# EAGLE board Temp Schematic (EAGLE 9.6.2)
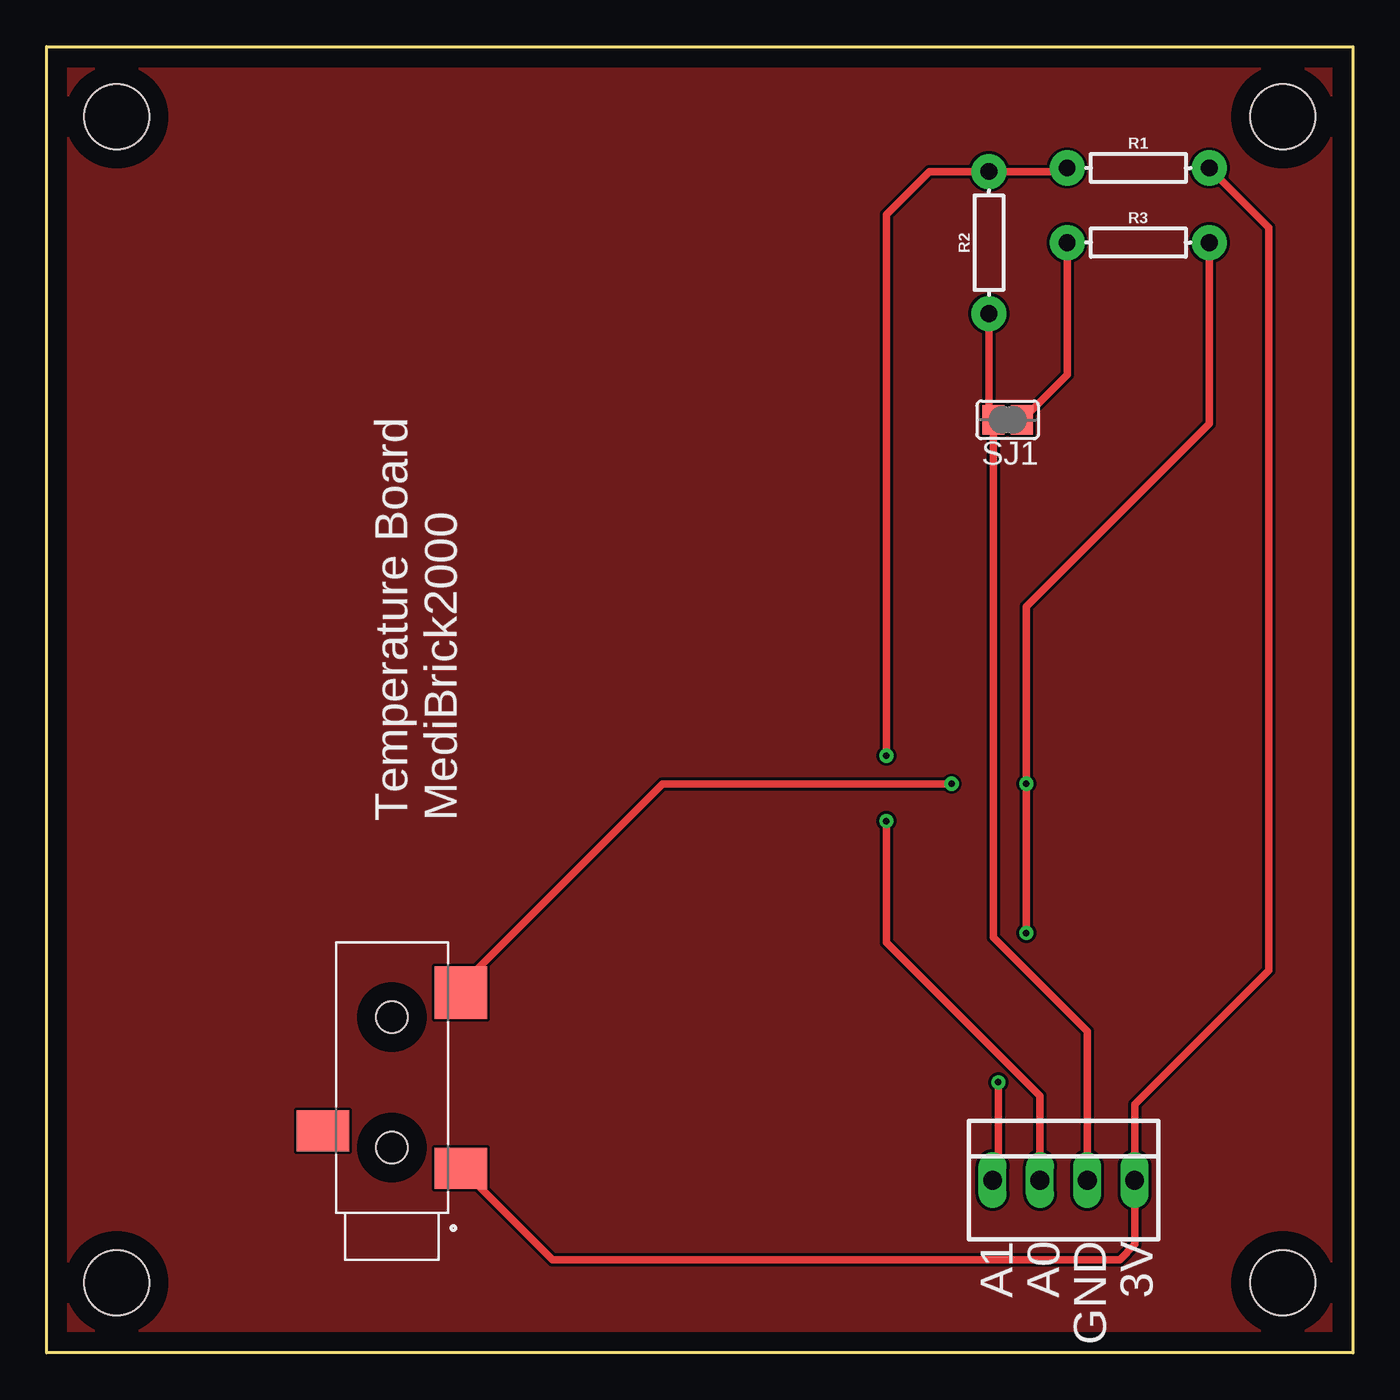
[diagram p0: board, top side]
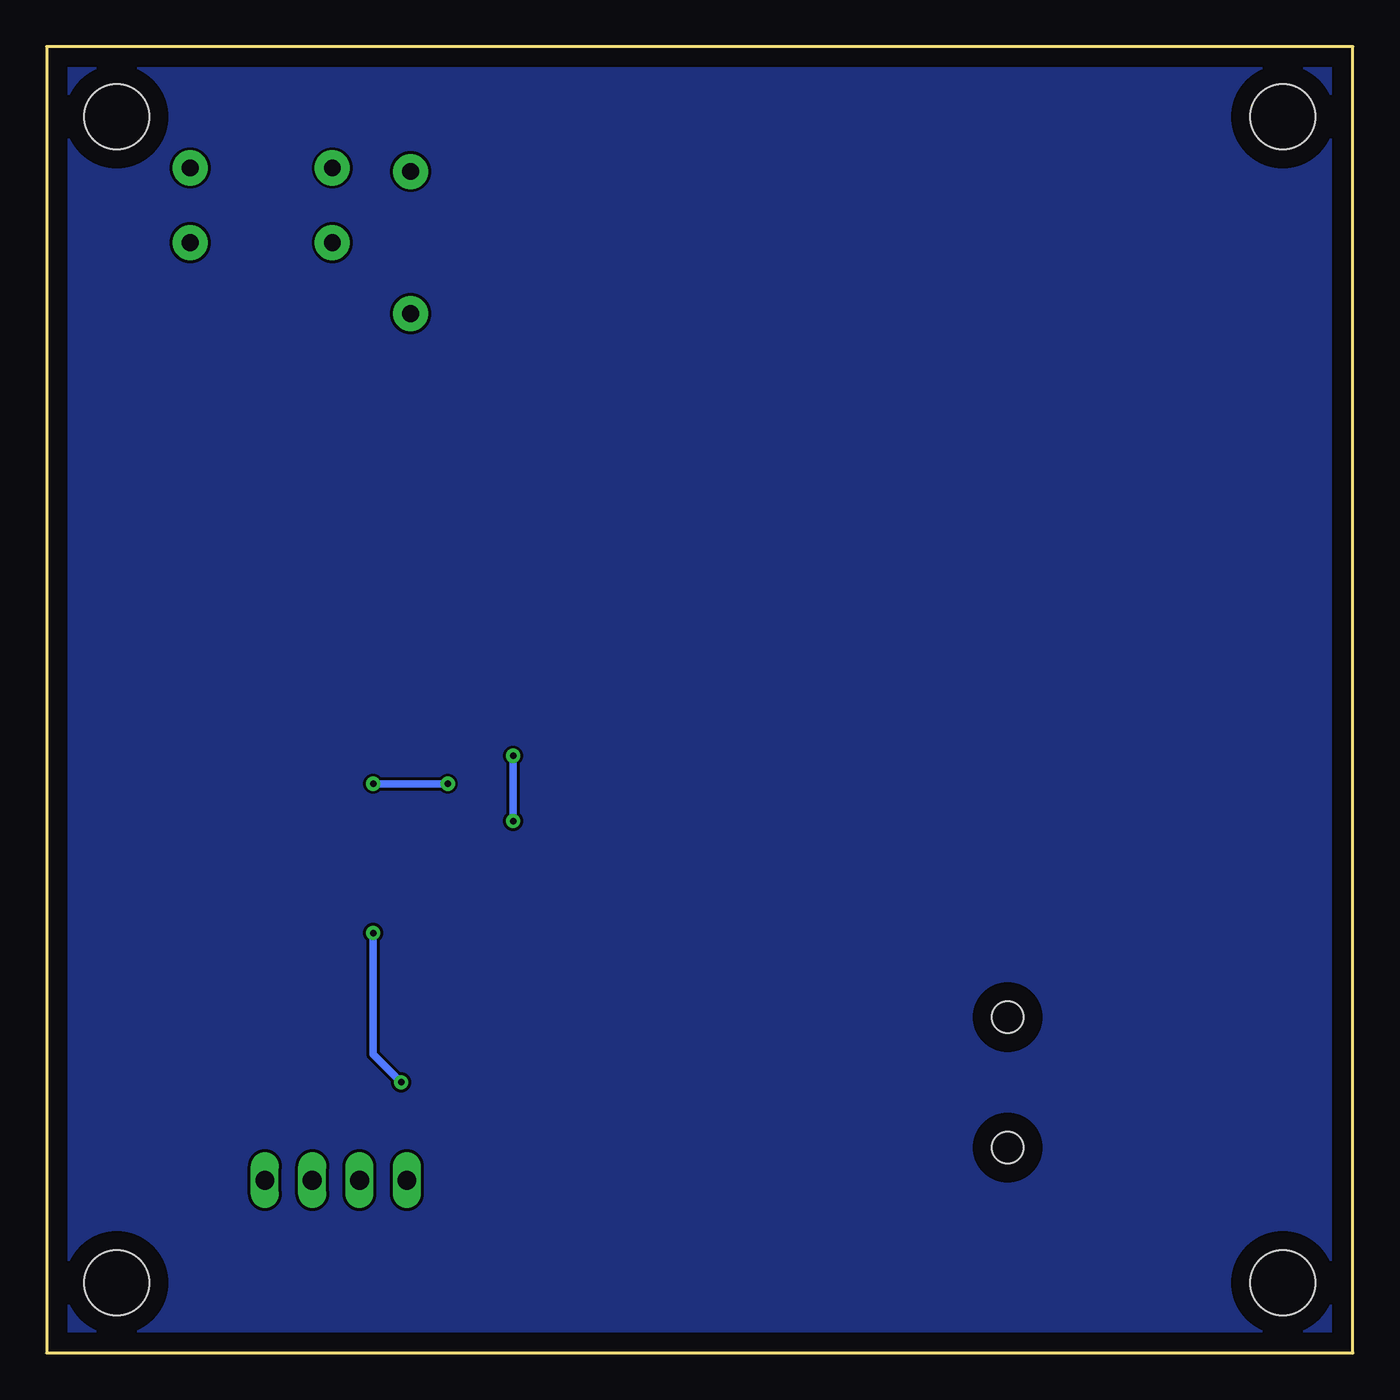
[diagram p1: board, bottom side, seen from below]

Size 70 x 70 mm. Coordinates in mm from the lower left corner, seen from the top.
Outline: 0,0 0,70 70,70 70,0 0,0
Copper layers (1*16): Top 0.035mm / dielectric 1.5mm / Bottom 0.035mm
Design rules "default": minimum track width 6mil, minimum drill 0.35mm, track to track 6mil, track to pad 6mil, pad to pad 6mil, via to via 6mil, smd to smd 6mil, copper to edge 40mil, drill to drill 6mil, minimum pad ring 10mil, minimum via ring 8mil, stop-mask expansion 4mil, vias tented up to drill 0mil, thermal gap 10mil
Holes 3.5 mm at 3.75,66.25 66.25,66.25 66.25,3.75 3.75,3.75

## Footprints (pad centres in the part's own frame; a part is rotated, then mirrored left to right if it is on the bottom)
22-23-2041 = drill 1 long: 1 -3.81,0; 2 -1.27,0; 3 1.27,0; 4 3.81,0
CUI_SJ-3523-SMT-TR = smd 2.2 x 2.8: 1 -1.1,-3.7; 3 0.9,3.7 | smd 2.8 x 2.8: 2 8.3,-3.7 | hole 1.7: 0,0; 7,0
AXIAL-0.3 = drill 0.9 pad 1.88: P$1 -3.81,0; P$2 3.81,0
SJ = smd 1.168 x 1.6: 1 -0.762,0; 2 0.762,0

## Placement (x,y rotation side)
4PIN  22-23-2041  [22-23-2041]  54.5,9.25 0 top
J2  SJ-3523-SMT-TR  [CUI_SJ-3523-SMT-TR]  18.5,11 90 top
R1  10k  [AXIAL-0.3]  58.5,63.5 0 top
R2  10k  [AXIAL-0.3]  50.5,59.5 90 top
R3  10k  [AXIAL-0.3]  58.5,59.5 0 top
SJ1  [SJ]  51.5,50 180 top

## Library data of the parts
4PIN = con-molex; MF: MOLEX; MPN: 22-23-2041; OC_FARNELL: 1462920; OC_NEWARK: 38C0355
J2 = SJ-3523-SMT-TR; AVAILABILITY: In Stock; CUI_PURCHASE_URL: https://www.cuidevices.com/product/interconnect/connectors/audio-connectors/jacks/sj-352x-smt-series?utm_source=snapeda.com&utm_medium=referral&utm_campaign=snapedaBOM; DESCRIPTION: 3.5 mm, Stereo, Right Angle, Surface Mount (SMT), 3 Conductors, 0~1 Internal Switches, Audio Jack Connector; MF: CUI Devices; MP: SJ-3523-SMT-TR; PACKAGE: None; PRICE: None; PURCHASE-URL: https://pricing.snapeda.com/search/part/SJ-3523-SMT-TR/?ref=eda
R1-R3 = SparkFun-Resistors; PROD_ID: RES-09435
SJ1 = jumper

## Nets
N$1: 4PIN.4 J2.1 R1.P$2
N$3: 4PIN.2 R1.P$1 R2.P$2
N$4: R3.P$1 SJ1.1
N$5: 4PIN.3 R2.P$1 SJ1.2
N$6: 4PIN.1 J2.2 R3.P$2

## Tracks (layer width: path | path; a pad name or v marks a point on that pad's centre or on a via)
3V
  pour Top: 0,0 70,0 70,70 0,70
GND
  pour Bottom: 0,0 0,70 70,70 70,0
N$1
  Top 0.406: J2.1 27.1,5 57.5,5 58.31,5.81 4PIN.4 58.31,13.31 65.5,20.5 65.5,60.31 R1.P$2
N$3  (via drill 0.35)
  Top 0.406: R1.P$1 54.5,63.31 R2.P$2 47.31,63.31 45,61 v45,32 | 4PIN.2 53.23,13.77 45,22 v45,28.5
  Bottom 0.406: v45,32 v45,28.5
N$4
  Top 0.406: R3.P$1 54.69,52.43 SJ1.1
N$5
  Top 0.152: 50.5,50.24 SJ1.2
  Top 0.406: R2.P$1 50.5,50.24 | SJ1.2 50.74,22.26 55.77,17.23 4PIN.3
N$6  (via drill 0.35)
  Top 0.152: 51,9.56 4PIN.1
  Top 0.406: J2.2 22.2,19.7 33,30.5 v48.5,30.5 | R3.P$2 62.31,49.81 52.5,40 v52.5,30.5 v52.5,22.5 | v51,14.5 51,9.56
  Bottom 0.406: v48.5,30.5 v52.5,30.5 | v52.5,22.5 52.5,16 v51,14.5

## Text on the board
tNames: Temperature Board / MediBrick2000 | A1 | A0 | GND | 3V